# Altium PCB BlinkBoard.PcbDoc (part 2 of 2)
Units mm, origin at the board's own origin, x right, y up, seen from the top; angles counter-clockwise.
Board outline 80 x 102 mm, 4 copper layers (Top Layer, Int1 (GND), Int2 (PWR), Bottom Layer), stack 1.369 mm thick; 153 components, 150 nets, 495 pads, 127 vias.
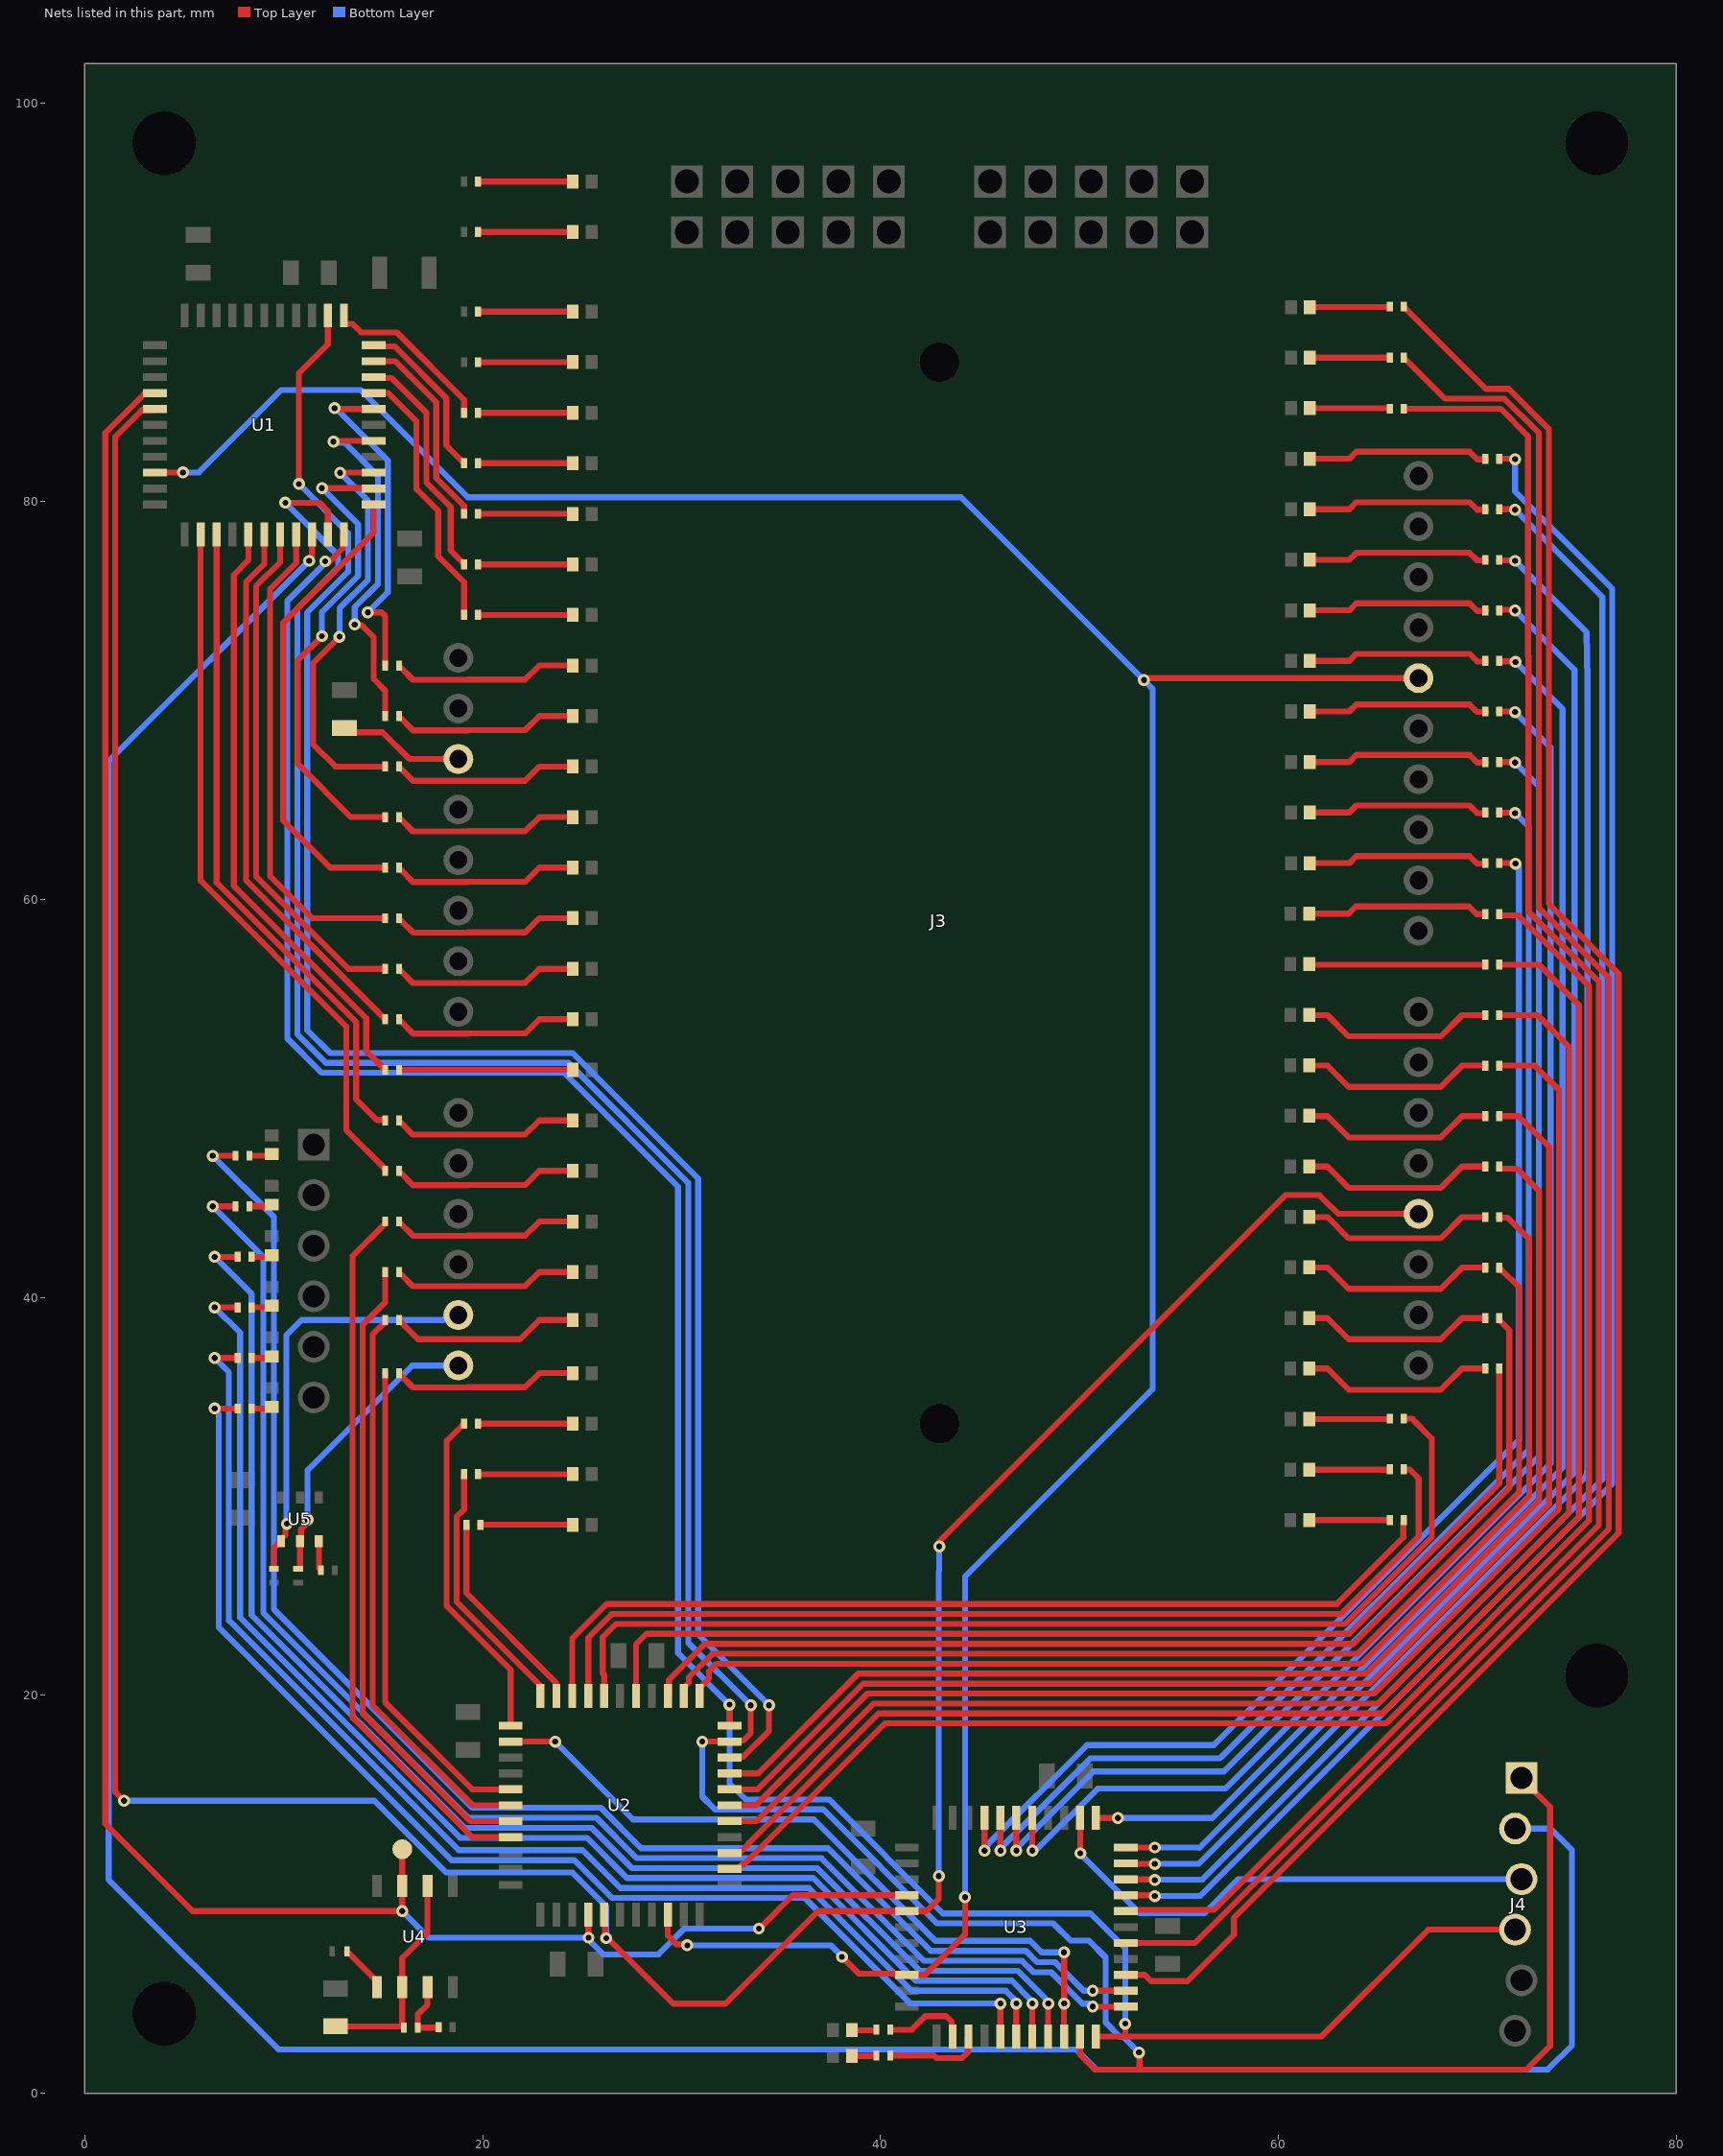
[diagram p4: the nets of this part, all layers, seen from the top]

## Via types
v1: diameter 0.6, hole 0.3, Top Layer to Bottom Layer, tented both sides, 127 vias

## Nets (pads, with @x,y where several pads share a name; then routed paths per layer and width w, separated by ;. In a path a pad name is that pad's centre, name@x,y a point inside that pad or via, vN(x,y) a via of type N, cw(c..) or ccw(c..) an arc to the next point about the centre after c; other vN are vias at no path point) (continued)
LED4: R5.1 U1.23 | length 8.7
  Top Layer w0.3: U1.23@13.026,89.344 13.026,88.976 13.076,88.926 13.445,88.926 13.878,88.493 15.681,88.493 19.065,85.109 R5.1@19.065,84.454
LED5: R6.1 U1.22 | length 8.4
  Top Layer w0.3: U1.22@14.526,87.844 14.576,87.794 15.563,87.794 18.172,85.185 18.172,82.807 18.965,82.014 19.065,82.014 R6.1@19.065,81.914
LED6: R7.1 U1.21 | length 10.2
  Top Layer w0.3: U1.21@14.526,87.044 15.605,87.044 17.672,84.978 17.672,81.168 19.065,79.775 R7.1@19.065,79.374
LED7: R8.1 U1.20 | length 11.8
  Top Layer w0.3: U1.20@14.526,86.244 14.576,86.194 15.439,86.194 17.172,84.462 17.172,80.957 18.399,79.73 18.399,77.537 19.002,76.934 19.065,76.934 R8.1@19.065,76.834
LED8: R9.1 U1.19 | length 13.5
  Top Layer w0.3: U1.19@14.526,85.444 15.25,85.444 16.672,84.023 16.672,80.619 17.764,79.526 17.764,77.24 19.065,75.939 R9.1@19.065,74.294
LED9: R10.1 U1.18 | length 17.6
  Top Layer w0.3: v1(12.557,84.683) 12.595,84.644 U1.18@14.526,84.644 U1.18@14.926,84.644 ; v1(14.233,74.421) 14.927,74.421 15.103,74.245 R10.1@15.103,71.754
  Bottom Layer w0.3: v1(12.557,84.683) 12.612,84.683 15.24,82.054 15.24,75.428 v1(14.233,74.421)
LED10: R11.1 U1.16 | length 18.2
  Top Layer w0.3: v1@12.691,83.044 U1.16@14.526,83.044 ; v1(13.573,73.811) 13.613,73.771 13.935,73.771 14.529,73.177 14.529,71.069 15.103,70.495 R11.1@15.103,69.214
  Bottom Layer w0.3: v1(12.506,83.006) 12.563,82.949 13.064,82.949 14.74,81.273 14.74,75.847 13.573,74.68 v1(13.573,73.811)
LED11: R12.1 U1.14 | length 21.1
  Top Layer w0.3: v1(12.811,73.202) 12.811,73.197 11.481,71.867 11.481,67.802 12.608,66.674 R12.1@15.103,66.674 ; v1(12.836,81.431) 12.849,81.444 U1.14@14.526,81.444
  Bottom Layer w0.3: v1(12.811,73.202) 12.811,74.625 14.24,76.054 14.24,80.027 v1(12.836,81.431)
LED12: R13.1 U1.13 | length 24
  Top Layer w0.3: v1(11.922,73.227) 10.719,72.024 10.719,66.799 13.384,64.134 R13.1@15.103,64.134 ; v1(11.922,80.669) 14.501,80.669 U1.13@14.526,80.644
  Bottom Layer w0.3: v1(11.922,73.227) 11.922,74.443 13.74,76.261 13.74,78.851 v1(11.922,80.669)
LED13: R14.1 U1.12 | length 23.9
  Top Layer w0.3: U1.12@14.526,79.844 14.526,78.448 9.982,73.904 9.982,63.957 12.345,61.594 R14.1@15.103,61.594
LED14: R15.1 U1.8 | length 24.4
  Top Layer w0.3: U1.8@10.626,78.344 10.626,76.911 9.322,75.607 9.322,61.163 11.431,59.054 R15.1@15.103,59.054
LED15: R16.1 U1.7 | length 26.1
  Top Layer w0.3: U1.7@9.826,78.344 9.826,76.953 8.613,75.74 8.613,61.165 13.264,56.514 R16.1@15.103,56.514
LED16: R17.1 U1.6 | length 27.7
  Top Layer w0.3: U1.6@9.026,78.344 9.026,76.86 8.105,75.939 8.105,60.966 13.057,56.014 13.063,56.014 R17.1@15.103,53.974
LED17: R18.1 U1.5 | length 30.4
  Top Layer w0.3: U1.5@8.226,78.344 8.226,77.038 7.493,76.305 7.493,60.689 14.148,54.034 14.148,52.389 R18.1@15.103,51.434
LED18: R19.1 U1.3 | length 33.2
  Top Layer w0.3: U1.3@6.626,78.344 6.626,60.848 13.648,53.827 13.648,49.954 14.687,48.915 15.103,48.915 R19.1@15.103,48.894
LED19: R20.1 U1.2 | length 35.8
  Top Layer w0.3: U1.2@5.826,78.344 5.826,60.941 13.148,53.62 13.148,48.409 15.103,46.454 R20.1@15.103,46.354
LED20: R21.1 U2.30 | length 36
  Top Layer w0.3: R21.1@15.103,43.814 15.103,43.714 13.47,42.081 13.47,18.877 19.47,12.877 U2.30@21.408,12.877
LED21: R22.1 U2.29 | length 32.3
  Top Layer w0.3: R22.1@15.103,41.274 15.103,39.756 13.97,38.623 13.97,19.084 19.377,13.677 U2.29@21.408,13.677
LED22: R23.1 U2.28 | length 28.6
  Top Layer w0.3: R23.1@15.103,38.861 15.103,38.761 14.47,38.128 14.47,19.498 19.491,14.477 U2.28@21.408,14.477
LED23: R24.1 U2.27 | length 24.7
  Top Layer w0.3: R24.1@15.103,36.194 15.103,19.653 19.479,15.277 U2.27@21.408,15.277
LED24: R25.1 U2.23 | length 16.9
  Top Layer w0.3: R25.1@19.065,33.654 19.065,33.554 18.965,33.554 18.192,32.781 18.192,24.492 21.408,21.276 U2.23@21.408,18.477
LED25: R26.1 U2.22 | length 13
  Top Layer w0.3: R26.1@19.065,31.114 19.065,29.342 18.692,28.969 18.692,24.7 22.908,20.484 U2.22@22.908,19.977
LED26: R27.1 U2.21 | length 10.5
  Top Layer w0.3: R27.1@19.192,28.574 19.192,25.139 23.708,20.623 U2.21@23.708,19.977
LED27: R28.1 U2.20 | length 47.7
  Top Layer w0.3: U2.20@24.508,19.977 24.508,22.872 26.229,24.593 62.932,24.593 66.274,27.934 66.274,28.703 66.298,28.703 R28.1@66.298,28.803
LED28: R29.1 U2.19 | length 50.6
  Top Layer w0.3: U2.19@25.308,19.977 25.308,22.906 26.495,24.093 63.139,24.093 67.04,27.994 67.04,30.911 66.595,31.356 R29.1@66.298,31.356
LED29: R30.1 U2.18 | length 53.5
  Top Layer w0.3: U2.18@26.108,19.977 26.108,21.029 26.038,21.1 26.038,22.928 26.702,23.593 63.346,23.593 67.7,27.947 67.7,32.917 66.71,33.908 R30.1@66.298,33.908
LED30: R31.1 U2.16 | length 55.1
  Top Layer w0.3: U2.16@27.708,19.977 27.708,22.562 28.239,23.093 63.553,23.093 71.098,30.638 R31.1@71.098,36.423
LED31: R32.1 U2.14 | length 55.8
  Top Layer w0.3: U2.14@29.308,19.977 29.358,20.027 29.358,20.78 31.171,22.593 63.76,22.593 71.598,30.431 71.598,38.36 71.098,38.86 R32.1@71.098,38.96
LED32: R33.1 U2.13 | length 58.4
  Top Layer w0.3: U2.13@30.108,19.977 30.108,20.377 30.358,20.627 30.358,20.899 31.552,22.093 63.968,22.093 72.098,30.224 72.098,40.498 71.198,41.398 71.098,41.398 R33.1@71.098,41.498
LED33: R34.1 U2.12 | length 61.2
  Top Layer w0.3: U2.12@30.908,19.977 30.908,20.377 31.382,20.851 31.382,21.216 31.759,21.593 64.175,21.593 72.598,30.017 72.598,42.929 71.514,44.014 71.098,44.014 R34.1@71.098,44.035
LED34: R35.1 U2.8 | length 64.5
  Top Layer w0.3: U2.8@32.408,16.077 33.857,16.077 38.873,21.093 64.382,21.093 73.098,29.809 73.098,45.35 71.977,46.472 71.098,46.472 R35.1@71.098,46.572
LED35: R36.1 U2.7 | length 68.2
  Top Layer w0.3: U2.7@32.408,15.277 33.819,15.277 39.135,20.593 64.589,20.593 73.598,29.602 73.598,47.568 72.058,49.109 R36.1@71.098,49.109
LED36: R37.1 U2.6 | length 72.4
  Top Layer w0.3: U2.6@32.408,14.477 33.73,14.477 39.346,20.093 64.796,20.093 74.098,29.395 74.098,50.421 72.873,51.646 R37.1@71.098,51.646
LED37: R38.1 U2.5 | length 76.2
  Top Layer w0.3: U2.5@32.408,13.677 33.743,13.677 39.659,19.593 65.003,19.593 74.598,29.188 74.598,52.597 73.012,54.183 R38.1@71.098,54.183
LED38: R39.1 U2.3 | length 80.3
  Top Layer w0.3: U2.3@32.408,12.077 32.903,12.077 33.358,12.532 33.358,12.555 39.895,19.093 65.21,19.093 75.098,28.981 75.098,54.704 73.082,56.72 R39.1@71.098,56.72
LED39: R40.1 U2.2 | length 83.3
  Top Layer w0.3: U2.2@32.408,11.277 32.808,11.277 33.058,11.527 33.153,11.527 40.219,18.593 65.417,18.593 75.6,28.775 75.6,55.65 72.056,59.194 71.098,59.194 R40.1@71.098,59.257
LED40: R41.1 U3.30 | length 66.8
  Top Layer w0.3: v1@45.222,12.416 U3.30@45.222,13.856 ; R41.1@71.098,61.823 71.891,61.823 v1(71.917,61.797)
  Bottom Layer w0.3: v1(45.228,12.198) 45.228,12.279 45.378,12.429 45.378,12.5 50.378,17.5 56.753,17.5 72.078,32.825 72.078,61.636 v1(71.917,61.797)
LED41: R42.1 U3.29 | length 69.5
  Top Layer w0.3: v1@46.022,12.416 U3.29@46.022,13.856 ; R42.1@71.073,64.363 v1@71.866,64.363
  Bottom Layer w0.3: v1(46.028,12.198) 46.028,12.279 46.178,12.429 46.178,12.467 50.55,16.839 57.058,16.839 72.578,32.359 72.578,63.651 v1(71.891,64.337)
LED42: R43.1 U3.28 | length 72.1
  Top Layer w0.3: v1@46.822,12.416 U3.28@46.822,13.856 ; R43.1@71.073,66.903 v1@71.866,66.903
  Bottom Layer w0.3: v1(46.828,12.198) 46.828,12.279 46.978,12.429 46.978,12.467 50.69,16.179 57.261,16.179 65.516,24.434 73.078,31.996 73.078,65.691 v1(71.891,66.877)
LED43: R44.1 U3.27 | length 75.1
  Top Layer w0.3: U3.27@47.622,13.856 47.622,12.416 47.628,12.41 v1(47.628,12.198) ; R44.1@71.073,69.443 v1@71.866,69.443
  Bottom Layer w0.3: v1(47.628,12.198) 47.679,12.198 47.736,12.14 50.911,15.315 57.337,15.315 73.678,31.656 73.678,31.978 73.678,67.63 v1(71.891,69.417)
LED44: R45.1 U3.23 | length 73
  Top Layer w0.3: U3.23@50.822,13.856 50.835,13.842 v1(51.927,13.842) ; R45.1@71.098,71.957 v1@71.891,71.957
  Bottom Layer w0.3: v1(51.927,13.842) 56.677,13.842 74.279,31.444 74.279,69.57 v1(71.917,71.932)
LED45: R46.1 U3.22 | length 75.7
  Top Layer w0.3: U3.22@52.322,12.356 v1(53.781,12.356) ; R46.1@71.073,74.548 v1@71.866,74.548
  Bottom Layer w0.3: v1(53.781,12.356) 56.015,12.356 56.027,12.343 74.88,31.195 74.88,31.283 74.88,71.534 v1(71.891,74.523)
LED46: R47.1 U3.21 | length 79.5
  Top Layer w0.3: U3.21@52.322,11.556 52.347,11.531 v1@53.705,11.531 ; R47.1@71.073,77.037 v1@71.866,77.037
  Bottom Layer w0.3: v1@53.705,11.531 v1(53.781,11.531) 55.977,11.531 75.48,31.034 75.531,31.404 75.531,71.017 75.48,73.423 v1(71.891,77.012)
LED47: R48.1 U3.20 | length 83.6
  Top Layer w0.3: U3.20@52.322,10.756 53.642,10.756 v1@53.68,10.718 ; R48.1@71.073,79.603 v1@71.866,79.603
  Bottom Layer w0.3: v1@53.68,10.718 53.705,10.743 56.169,10.743 76.277,30.851 76.277,75.192 v1(71.891,79.577)
  other v1: 53.781,10.718
LED48: R49.1 U3.19 | length 87.2
  Top Layer w0.3: U3.19@52.322,9.956 v1@53.642,9.956 ; R49.1@71.073,82.143 v1@71.866,82.143
  Bottom Layer w0.3: v1(53.781,9.918) 56.051,9.918 76.777,30.644 76.777,75.611 71.891,80.496 v1(71.891,82.117)
LED49: R50.1 U3.18 | length 94.8
  Top Layer w0.3: U3.18@52.322,9.156 52.372,9.206 52.935,9.206 52.947,9.218 56.749,9.218 76.1,28.568 76.1,55.858 72.567,59.391 72.567,72.201 72.541,72.226 72.541,83.273 71.157,84.657 R50.1@66.298,84.657
LED50: R51.1 U3.16 | length 97.9
  Top Layer w0.3: U3.16@52.337,7.54 U3.16@52.322,7.556 55.794,7.556 76.6,28.361 76.6,56.065 73.085,59.579 73.085,83.436 71.364,85.157 68.363,85.157 66.398,87.123 66.298,87.123 R51.1@66.298,87.223
LED51: R52.1 U3.14 | length 101.6
  Top Layer w0.3: U3.14@52.322,5.956 53.273,5.956 53.59,5.639 55.423,5.639 57.76,7.976 57.76,8.814 77.1,28.154 77.1,56.272 73.585,59.786 73.585,83.643 71.571,85.657 70.429,85.657 66.398,89.688 66.298,89.688 R52.1@66.298,89.788
LED52: R53.1 U3.13 | length 75.7
  Top Layer w0.3: v1(6.436,47.116) R53.1@7.584,47.116 ; v1@50.882,5.156 U3.13@52.322,5.156
  Bottom Layer w0.3: v1(6.436,47.116) 9.509,44.043 9.509,24.332 19.486,14.355 25.929,14.355 27.965,12.319 37.363,12.319 42.519,7.164 47.311,7.164 47.888,6.587 48.781,6.587 50.204,5.163 50.662,5.163 v1(50.664,5.162)
LED53: R54.1 U3.12 | length 73.9
  Top Layer w0.3: v1(6.436,44.576) R54.1@7.584,44.576 ; v1@50.882,4.356 U3.12@52.322,4.356
  Bottom Layer w0.3: v1(6.436,44.576) 8.976,42.036 8.976,24.158 19.291,13.843 25.734,13.843 27.758,11.819 37.025,11.819 42.181,6.664 47.104,6.664 47.681,6.087 48.574,6.087 50.149,4.512 50.432,4.512 50.582,4.362 v1(50.664,4.362)
LED54: R55.1 U3.8 | length 69.5
  Top Layer w0.3: v1(6.537,42.036) R55.1@7.686,42.036 ; U3.8@48.422,2.856 v1@48.422,4.295
  Bottom Layer w0.3: v1(6.537,42.036) 8.391,40.182 8.391,24.036 19.084,13.343 25.484,13.343 27.508,11.319 36.818,11.319 41.974,6.164 46.897,6.164 48.278,4.783 48.278,4.745 48.428,4.595 v1(48.428,4.514)
LED55: R56.1 U3.7 | length 66.6
  Top Layer w0.3: v1(6.537,39.496) R56.1@7.686,39.496 ; U3.7@47.622,2.856 v1@47.622,4.295
  Bottom Layer w0.3: v1(6.537,39.496) 7.807,38.226 7.807,23.913 18.877,12.843 25.23,12.843 27.254,10.819 36.611,10.819 41.766,5.664 46.597,5.664 47.478,4.783 47.478,4.745 47.628,4.595 v1(47.628,4.514)
LED56: R57.1 U3.6 | length 63.7
  Top Layer w0.3: v1(6.537,36.956) R57.1@7.686,36.956 ; U3.6@46.822,2.856 v1@46.822,4.295
  Bottom Layer w0.3: v1(6.537,36.956) 7.249,36.245 7.249,23.764 18.795,12.217 25.026,12.217 26.924,10.319 36.404,10.319 41.559,5.164 46.297,5.164 46.678,4.783 46.678,4.745 46.828,4.595 v1(46.828,4.514)
LED57: R58.1 U3.5 | length 60.8
  Top Layer w0.3: v1(6.537,34.416) R58.1@7.686,34.416 ; U3.5@46.022,2.856 v1@46.022,4.295
  Bottom Layer w0.3: v1(6.537,34.416) 6.537,34.335 6.74,34.132 6.74,23.418 18.441,11.717 24.61,11.717 26.508,9.819 36.197,9.819 41.502,4.514 v1(46.028,4.514)
LED58: R59.1 U3.3 | length 4.9
  Top Layer w0.3: R59.1@40.491,1.904 42.681,1.904 42.808,1.777 44.104,1.777 44.384,2.057 44.384,2.818 U3.3@44.422,2.856
LED59: R60.1 U3.2 | length 4.3
  Top Layer w0.3: R60.1@40.491,3.199 41.564,3.199 42.25,3.885 43.291,3.885 43.572,3.605 43.572,2.906 U3.2@43.622,2.856
NetC10_2: C10.2 R62.1 U4.2 U4.6 | length 11.1
  Top Layer w0.3: C10.2@12.608,3.367 R62.1@16.042,3.367 ; R62.1@16.042,3.301 R62.1@16.042,3.367 ; U4.2@17.231,10.433 17.231,8.076 15.961,6.806 U4.6@15.961,5.333 15.961,3.483 16.042,3.401 R62.1@16.042,3.367
NetC11_2: C11.2 U4.5 | length 2.5
  Top Layer w0.3: C11.2@13.186,7.136 13.186,7.061 13.211,7.036 13.286,7.036 U4.5@14.589,5.733 ; U4.5@14.591,5.733 14.691,5.633 U4.5@14.691,5.333
NetC14_2: C14.2 J3.28 | length 6.4
  Top Layer w0.3: C14.2@13.063,68.621 13.287,68.396 14.975,68.396 16.317,67.055 J3.28@18.78,67.055
NetD1_1: D1.1 R1.2 | length 4.8
  Top Layer w0.3: R1.2@19.765,96.074 D1.1@24.528,96.074
NetD2_1: D2.1 R2.2 | length 4.8
  Top Layer w0.3: R2.2@19.765,93.534 D2.1@24.528,93.534
NetD3_1: D3.1 R3.2 | length 4.8
  Top Layer w0.3: R3.2@19.765,89.534 D3.1@24.528,89.534
NetD4_1: D4.1 R4.2 | length 4.8
  Top Layer w0.3: R4.2@19.765,86.994 D4.1@24.528,86.994
NetD5_1: D5.1 R5.2 | length 4.8
  Top Layer w0.3: R5.2@19.765,84.454 D5.1@24.528,84.454
NetD6_1: D6.1 R6.2 | length 4.8
  Top Layer w0.3: R6.2@19.765,81.914 D6.1@24.528,81.914
NetD7_1: D7.1 R7.2 | length 4.8
  Top Layer w0.3: R7.2@19.765,79.374 D7.1@24.528,79.374
NetD8_1: D8.1 R8.2 | length 4.8
  Top Layer w0.3: R8.2@19.765,76.834 D8.1@24.528,76.834
NetD9_1: D9.1 R9.2 | length 4.8
  Top Layer w0.3: R9.2@19.765,74.294 D9.1@24.528,74.294
NetD10_1: D10.1 R10.2 | length 9.4
  Top Layer w0.3: R10.2@15.803,71.754 15.803,71.654 15.883,71.654 16.502,71.035 19.236,71.035 19.243,71.043 22.133,71.043 22.844,71.754 D10.1@24.528,71.754
NetD11_1: D11.1 R11.2 | length 9.4
  Top Layer w0.3: R11.2@15.803,69.214 15.803,69.114 15.883,69.114 16.502,68.495 19.236,68.495 19.243,68.503 22.133,68.503 22.844,69.214 D11.1@24.528,69.214
NetD12_1: D12.1 R12.2 | length 9.4
  Top Layer w0.3: R12.2@15.803,66.674 15.803,66.574 15.883,66.574 16.502,65.955 19.236,65.955 19.243,65.963 22.133,65.963 22.844,66.674 D12.1@24.528,66.674
NetD13_1: D13.1 R13.2 | length 9.4
  Top Layer w0.3: R13.2@15.803,64.134 15.803,64.034 15.883,64.034 16.502,63.415 19.236,63.415 19.243,63.423 22.133,63.423 22.844,64.134 D13.1@24.528,64.134
NetD14_1: D14.1 R14.2 | length 9.4
  Top Layer w0.3: R14.2@15.803,61.594 15.803,61.494 15.883,61.494 16.502,60.875 19.236,60.875 19.243,60.883 22.133,60.883 22.844,61.594 D14.1@24.528,61.594
NetD15_1: D15.1 R15.2 | length 9.4
  Top Layer w0.3: R15.2@15.803,59.054 15.803,58.954 15.883,58.954 16.502,58.335 19.236,58.335 19.243,58.343 22.133,58.343 22.844,59.054 D15.1@24.528,59.054
NetD16_1: D16.1 R16.2 | length 9.4
  Top Layer w0.3: R16.2@15.803,56.514 15.803,56.414 15.883,56.414 16.502,55.795 19.236,55.795 19.243,55.803 22.133,55.803 22.844,56.514 D16.1@24.528,56.514
NetD17_1: D17.1 R17.2 | length 9.4
  Top Layer w0.3: R17.2@15.803,53.974 15.803,53.874 15.883,53.874 16.502,53.255 19.236,53.255 19.243,53.263 22.133,53.263 22.844,53.974 D17.1@24.528,53.974
NetD18_1: D18.1 R18.2 | length 8.7
  Top Layer w0.3: R18.2@15.803,51.434 D18.1@24.528,51.434
NetD19_1: D19.1 R19.2 | length 9.4
  Top Layer w0.3: R19.2@15.803,48.894 15.803,48.794 15.883,48.794 16.502,48.175 19.236,48.175 19.243,48.183 22.133,48.183 22.844,48.894 D19.1@24.528,48.894
NetD20_1: D20.1 R20.2 | length 9.4
  Top Layer w0.3: R20.2@15.803,46.354 15.803,46.254 15.883,46.254 16.502,45.635 19.236,45.635 19.243,45.643 22.133,45.643 22.844,46.354 D20.1@24.528,46.354
NetD21_1: D21.1 R21.2 | length 9.4
  Top Layer w0.3: R21.2@15.803,43.814 15.803,43.714 15.883,43.714 16.502,43.095 19.236,43.095 19.243,43.103 22.133,43.103 22.844,43.814 D21.1@24.528,43.814
NetD22_1: D22.1 R22.2 | length 9.4
  Top Layer w0.3: R22.2@15.803,41.274 15.803,41.174 15.883,41.174 16.502,40.555 19.236,40.555 19.243,40.563 22.133,40.563 22.844,41.274 D22.1@24.528,41.274
NetD23_1: D23.1 R23.2 | length 9.6
  Top Layer w0.3: R23.2@15.803,38.861 15.803,38.761 15.883,38.761 16.747,37.897 21.88,37.897 22.844,38.861 D23.1@24.528,38.861
NetD24_1: D24.1 R24.2 | length 9.4
  Top Layer w0.3: R24.2@15.803,36.194 15.803,36.094 15.883,36.094 16.502,35.475 19.236,35.475 19.243,35.483 22.133,35.483 22.844,36.194 D24.1@24.528,36.194
NetD25_1: D25.1 R25.2 | length 4.8
  Top Layer w0.3: R25.2@19.765,33.654 D25.1@24.528,33.654
NetD26_1: D26.1 R26.2 | length 4.8
  Top Layer w0.3: R26.2@19.765,31.114 D26.1@24.528,31.114
NetD27_1: D27.1 R27.2 | length 4.6
  Top Layer w0.3: R27.2@19.892,28.574 D27.1@24.528,28.574
NetD28_1: D28.1 R28.2 | length 4.1
  Top Layer w0.3: D28.1@61.546,28.803 R28.2@65.598,28.803
NetD29_1: D29.1 R29.2 | length 4.1
  Top Layer w0.3: D29.1@61.546,31.343 65.598,31.343 R29.2@65.598,31.356
NetD30_1: D30.1 R30.2 | length 4.1
  Top Layer w0.3: D30.1@61.546,33.883 65.598,33.883 R30.2@65.598,33.908
NetD31_1: D31.1 R31.2 | length 9.7
  Top Layer w0.3: D31.1@61.546,36.423 62.467,36.423 63.535,35.356 68.158,35.356 69.225,36.423 R31.2@70.398,36.423
NetD32_1: D32.1 R32.2 | length 9.7
  Top Layer w0.3: D32.1@61.546,38.96 62.467,38.96 63.535,37.893 68.158,37.893 69.225,38.96 R32.2@70.398,38.96
NetD33_1: D33.1 R33.2 | length 9.7
  Top Layer w0.3: D33.1@61.546,41.498 62.467,41.498 63.535,40.43 68.158,40.43 69.225,41.498 R33.2@70.398,41.498
NetD34_1: D34.1 R34.2 | length 9.7
  Top Layer w0.3: D34.1@61.546,44.035 62.467,44.035 63.535,42.967 68.158,42.967 69.225,44.035 R34.2@70.398,44.035
NetD35_1: D35.1 R35.2 | length 9.7
  Top Layer w0.3: D35.1@61.546,46.572 62.467,46.572 63.535,45.504 68.158,45.504 69.225,46.572 R35.2@70.398,46.572
NetD36_1: D36.1 R36.2 | length 9.7
  Top Layer w0.3: D36.1@61.546,49.109 62.467,49.109 63.535,48.041 68.158,48.041 69.225,49.109 R36.2@70.398,49.109
NetD37_1: D37.1 R37.2 | length 9.7
  Top Layer w0.3: D37.1@61.546,51.646 62.467,51.646 63.535,50.578 68.158,50.578 69.225,51.646 R37.2@70.398,51.646
NetD38_1: D38.1 R38.2 | length 9.7
  Top Layer w0.3: D38.1@61.546,54.183 62.467,54.183 63.535,53.115 68.158,53.115 69.225,54.183 R38.2@70.398,54.183
NetD39_1: D39.1 R39.2 | length 8.9
  Top Layer w0.3: D39.1@61.546,56.743 61.569,56.72 R39.2@70.398,56.72
NetD40_1: D40.1 R40.2 | length 9.2
  Top Layer w0.3: D40.1@61.546,59.283 63.535,59.283 63.89,59.638 69.58,59.638 69.961,59.257 R40.2@70.398,59.257
NetD41_1: D41.1 R41.2 | length 9.2
  Top Layer w0.3: D41.1@61.571,61.823 63.56,61.823 63.915,62.177 69.605,62.177 69.986,61.796 R41.2@70.424,61.796
NetD42_1: D42.1 R42.2 | length 9.2
  Top Layer w0.3: D42.1@61.571,64.363 63.56,64.363 63.915,64.717 69.605,64.717 69.986,64.336 R42.2@70.424,64.336
NetD43_1: D43.1 R43.2 | length 9.2
  Top Layer w0.3: D43.1@61.571,66.903 63.56,66.903 63.915,67.258 69.605,67.258 69.986,66.877 R43.2@70.424,66.877
NetD44_1: D44.1 R44.2 | length 9.2
  Top Layer w0.3: D44.1@61.571,69.443 63.56,69.443 63.915,69.798 69.605,69.798 69.986,69.417 R44.2@70.424,69.417
NetD45_1: D45.1 R45.2 | length 9.2
  Top Layer w0.3: D45.1@61.571,71.983 63.56,71.983 63.915,72.338 69.605,72.338 69.986,71.957 R45.2@70.424,71.957
NetD46_1: D46.1 R46.2 | length 9.2
  Top Layer w0.3: D46.1@61.571,74.523 63.56,74.523 63.915,74.878 69.605,74.878 69.986,74.497 R46.2@70.424,74.497
NetD47_1: D47.1 R47.2 | length 9.2
  Top Layer w0.3: D47.1@61.571,77.063 63.56,77.063 63.915,77.418 69.605,77.418 69.986,77.037 R47.2@70.424,77.037
NetD48_1: D48.1 R48.2 | length 9.2
  Top Layer w0.3: D48.1@61.571,79.603 63.56,79.603 63.915,79.958 69.605,79.958 69.986,79.577 R48.2@70.424,79.577
NetD49_1: D49.1 R49.2 | length 9.2
  Top Layer w0.3: D49.1@61.571,82.143 63.56,82.143 63.915,82.498 69.605,82.498 69.986,82.117 R49.2@70.424,82.117
NetD50_1: D50.1 R50.2 | length 4.1
  Top Layer w0.3: D50.1@61.571,84.683 65.598,84.683 R50.2@65.598,84.657
NetD51_1: D51.1 R51.2 | length 4
  Top Layer w0.3: D51.1@61.571,87.223 R51.2@65.598,87.223
NetD52_1: D52.1 R52.2 | length 4.1
  Top Layer w0.3: D52.1@61.571,89.763 65.598,89.763 R52.2@65.598,89.788
NetD53_1: D53.1 R53.2 | length 1.2
  Top Layer w0.3: R53.2@8.284,47.116 9.324,47.116 D53.1@9.407,47.2
NetD54_1: D54.1 R54.2 | length 1.2
  Top Layer w0.3: R54.2@8.284,44.576 9.324,44.576 D54.1@9.407,44.66
NetD55_1: D55.1 R55.2 | length 1.1
  Top Layer w0.3: R55.2@8.386,42.036 9.324,42.036 D55.1@9.407,42.12
NetD56_1: D56.1 R56.2 | length 1.1
  Top Layer w0.3: R56.2@8.386,39.496 9.324,39.496 D56.1@9.407,39.58
NetD57_1: D57.1 R57.2 | length 1.1
  Top Layer w0.3: R57.2@8.386,36.956 9.324,36.956 D57.1@9.407,37.04
NetD58_1: D58.1 R58.2 | length 1.1
  Top Layer w0.3: R58.2@8.386,34.416 9.324,34.416 D58.1@9.407,34.5
NetD59_1: D59.1 R59.2 | length 1.3
  Top Layer w0.3: D59.1@38.559,1.879 39.791,1.879 R59.2@39.791,1.904
NetD60_1: D60.1 R60.2 | length 1.3
  Top Layer w0.3: D60.1@38.559,3.174 39.791,3.174 R60.2@39.791,3.199
NetR61_1: R61.1 R62.2 U4.7 | length 3.3
  Top Layer w0.3: U4.7@17.231,5.333 17.231,4.469 16.742,3.981 R62.2@16.742,3.301 17.795,3.301 R61.1@17.795,3.326
NetR63_2: R63.2 U5.6 | length 1.5
  Top Layer w0.3: U5.6@11.77,27.746 11.77,26.395 R63.2@11.876,26.288
NetU1_24: U1.24 U2.9 | length 92.9
  Top Layer w0.3: v1(10.77,80.874) 10.77,86.442 12.226,87.899 U1.24@12.226,89.344 ; U2.9@32.408,16.877 32.458,16.927 33.107,16.927 34.392,18.212 v1(34.392,19.507)
  Bottom Layer w0.3: v1(10.77,80.874) 13.24,78.403 13.24,76.469 11.185,74.413 11.185,53.428 12.33,52.283 24.519,52.283 30.836,45.966 30.836,23.063 33.742,20.157 33.746,20.157 34.386,19.517 34.386,19.512 v1(34.392,19.507)
NetU2_24: U2.24 U3.9 | length 36.2
  Top Layer w0.3: U2.24@21.408,17.677 v1(23.647,17.678) v1(23.647,17.678) ; U3.9@49.222,2.856 v1@49.222,4.295 ; v1(49.222,7.087) 49.23,7.087 49.228,7.084 v1(49.228,4.514)
  Bottom Layer w0.3: v1(23.647,17.678) 27.559,13.767 36.652,13.767 42.755,7.664 47.518,7.664 48.095,7.087 v1(49.222,7.087)
PATTERN1: TP1.1 U1.37 U2.37 U3.37 U4.3 | length 121.9
  Top Layer w0.3: U1.37@3.576,85.394 U1.37@3.526,85.444 3.476,85.394 2.98,85.394 1.032,83.447 1.032,13.548 5.424,9.156 v1(15.961,9.156) U4.3@15.961,10.433 TP1.1@15.961,12.267 ; U2.37@25.308,8.977 25.308,7.839 v1(25.324,7.823) ; v1(33.884,8.28) 33.909,8.28 35.584,9.956 U3.37@41.322,9.956 U3.37@41.293,9.927
  Bottom Layer w0.3: v1(15.961,9.156) 17.293,7.823 v1(25.324,7.823) 25.324,7.742 25.474,7.592 25.474,7.57 26.058,6.985 28.829,6.985 30.124,8.28 v1(33.884,8.28)
PATTERN2: J3.4 U1.38 U2.38 U3.38 | length 170.4
  Top Layer w0.3: v1(1.981,14.707) 1.956,14.707 1.532,15.13 1.532,83.24 2.887,84.594 3.476,84.594 U1.38@3.526,84.644 ; U2.38@26.108,8.977 26.158,8.927 26.158,7.937 29.59,4.505 32.202,4.505 36.852,9.156 U3.38@41.322,9.156 42.303,9.156 42.926,9.779 v1(42.926,10.922) ; v1(42.951,27.483) 42.951,27.737 60.35,45.136 62.052,45.136 62.653,44.535 62.674,44.535 63.014,44.195 J3.4@67.04,44.195
  Bottom Layer w0.3: v1(1.981,14.707) 14.564,14.707 18.17,11.1 24.52,11.1 26.213,9.407 v1(26.213,7.798) ; v1(42.926,10.922) 42.926,26.238 42.951,26.264 v1(42.951,27.483)
RESET: J3.14 U1.42 U2.42 U3.42 | length 156.3
  Top Layer w0.3: U1.42@3.324,81.452 v1(4.942,81.452) ; U1.42@3.526,81.444 U1.42@3.532,81.439 ; U2.42@29.308,8.977 29.308,7.92 29.73,7.499 30.229,7.499 v1(30.286,7.441) ; v1(38.059,6.857) 38.897,6.019 40.696,6.019 40.709,6.006 41.272,6.006 U3.42@41.322,5.956 42.224,5.956 44.247,7.979 v1(44.247,9.855) ; v1@53.238,71.119 J3.14@67.04,71.119
  Bottom Layer w0.3: v1(4.942,81.452) 5.735,81.452 9.881,85.598 13.868,85.598 19.255,80.212 44.045,80.212 v1(53.238,71.018) 53.67,70.587 53.67,35.382 44.247,25.959 v1(44.247,9.855) ; v1(30.286,7.441) 37.5,7.441 38.059,6.882 v1(38.059,6.857)
SCL: J3.17 R65.1 U5.5 | length 14.9
  Top Layer w0.3: R65.1@10.728,26.364 10.82,26.456 U5.5@10.82,27.746 10.87,27.796 10.87,28.34 11.201,28.672 v1(11.201,28.829)
  Bottom Layer w0.3: v1(11.201,28.829) 11.201,31.318 16.458,36.575 J3.17@18.78,36.575
SDA: J3.18 R64.1 U5.4 | length 20.9
  Top Layer w0.3: R64.1@9.509,26.359 9.509,27.385 U5.4@9.72,27.596 ; U5.4@9.87,27.746 9.87,27.846 10.084,28.06 10.084,28.55 v1(10.16,28.626)
  Bottom Layer w0.3: v1(10.16,28.626) 10.135,28.651 10.135,38.1 10.897,38.862 18.004,38.862 18.028,38.885 18.55,38.885 J3.18@18.78,39.115
TCK: J4.4 U1.11 U2.11 U3.11 | length 132.6
  Top Layer w0.3: v1(12.09,76.987) 12.116,76.987 12.217,76.886 12.976,77.645 12.976,78.294 U1.11@13.026,78.344 ; U2.11@32.408,18.477 32.408,19.53 v1(32.41,19.533) ; U3.11@50.822,2.856 52.299,2.856 ; v1(52.299,3.503) 52.299,2.856 ; J4.4@71.891,8.226 67.529,8.226 62.159,2.856 52.299,2.856
  Bottom Layer w0.3: v1(12.09,76.987) 12.09,76.906 10.185,75.001 10.185,53.014 11.916,51.283 24.105,51.283 29.82,45.568 29.82,22.123 v1(32.41,19.533) 32.41,15.57 33.214,14.767 37.405,14.767 43.129,9.042 50.559,9.042 52.299,7.303 v1(52.299,3.503)
TDI: J4.2 U1.9 | length 163
  Top Layer w0.3: v1(11.278,77.013) 11.278,77.089 11.426,77.238 U1.9@11.426,78.344 U1.9@11.398,78.372
  Bottom Layer w0.3: v1(11.278,77.013) 1.204,66.939 1.204,10.734 9.728,2.21 49.835,2.21 50.851,1.194 73.533,1.194 74.752,2.413 74.752,12.217 73.664,13.306 J4.2@71.891,13.306
TDO: J4.3 U3.24 | length 25.9
  Top Layer w0.3: U3.24@50.022,13.856 50.038,13.839 v1(50.038,12.065)
  Bottom Layer w0.3: v1(50.038,12.065) 50.038,12.04 53.01,9.068 56.281,9.068 57.979,10.766 J4.3@72.209,10.766
TMS: J4.1 U1.10 U2.10 U3.10 | length 158.7
  Top Layer w0.3: v1(10.084,79.934) 11.811,79.934 12.226,79.518 U1.10@12.226,78.344 ; v1(31.039,17.678) U2.10@32.408,17.677 U2.10@32.408,17.677 32.458,17.727 33.094,17.727 33.477,18.11 v1(33.477,19.507) ; U3.10@50.022,2.856 50.022,1.947 50.775,1.194 53.01,1.194 ; v1(52.984,2.057) 53.01,2.032 53.01,1.194 ; J4.1@72.209,15.846 73.653,14.402 73.653,2.38 72.466,1.194 53.01,1.194
  Bottom Layer w0.3: v1(10.084,79.934) 12.74,77.277 12.74,76.676 10.685,74.62 10.685,53.221 12.123,51.783 24.312,51.783 30.336,45.759 30.336,22.649 v1(33.477,19.507) ; v1(31.039,17.678) 31.039,14.91 31.682,14.267 37.117,14.267 42.842,8.542 48.685,8.542 49.547,7.68 50.466,7.68 51.314,6.833 51.314,3.569 52.052,2.83 52.212,2.83 v1(52.984,2.057)
pads on no net: J2. J2.1 J3. J3.1 J3.2 J3.3 J3.5 J3.8 J3.16 J3.19 J3.23 J3.29 MH1.1 MH2.1 MH3.1 MH4.1 U1.1 U1.31 U1.32 U1.33 U1.34 U1.36 U1.43 U1.44 U2.1 U2.31 U2.32 U2.33 U2.34 U2.36 U2.43 U2.44 U3.1 U3.31 U3.32 U3.33 U3.34 U3.36 U3.43 U3.44

## Polygon pours and split planes (outlines as drawn)
GND on Int1 (GND) (split plane): 79.49,0.51 0.51,0.51 0.51,101.49 79.49,101.49
+3V3 on Int2 (PWR) (split plane): 79.49,0.51 0.51,0.51 0.51,101.49 79.49,101.49

## Silkscreen, mask and mechanical layers (free items; w line width, h text height)
Top Overlay:
  text "A0" at 2.429,46.736 h3
  text "A1" at 2.429,44.196 h3
  text "A2" at 2.429,41.656 h3
  text "DO" at 2.429,39.116 h3
  text "D1" at 2.429,36.576 h3
  text "D2" at 2.429,34.036 h3

## Text inside footprints (layer, text, board x,y; h text height)
J4: Top Overlay "TMS" at 74.241,15.084 h2; Top Overlay "TDI" at 74.241,12.544 h2; Top Overlay "TDO" at 74.241,10.004 h2; Top Overlay "TCK" at 74.241,7.464 h2; Top Overlay "GND" at 74.241,4.924 h2; Top Overlay "VCC" at 74.241,2.384 h2